# Altium PCB NanoV3.2.PcbDoc
Units mil, origin at the board's own origin, x right, y up, seen from the top; angles counter-clockwise.
Board outline 1700 x 700 mil, 2 copper layers (Top, Bottom); 33 components, 43 nets, 172 pads, 39 vias.
Unrouted connection lines stored in the file: 22.
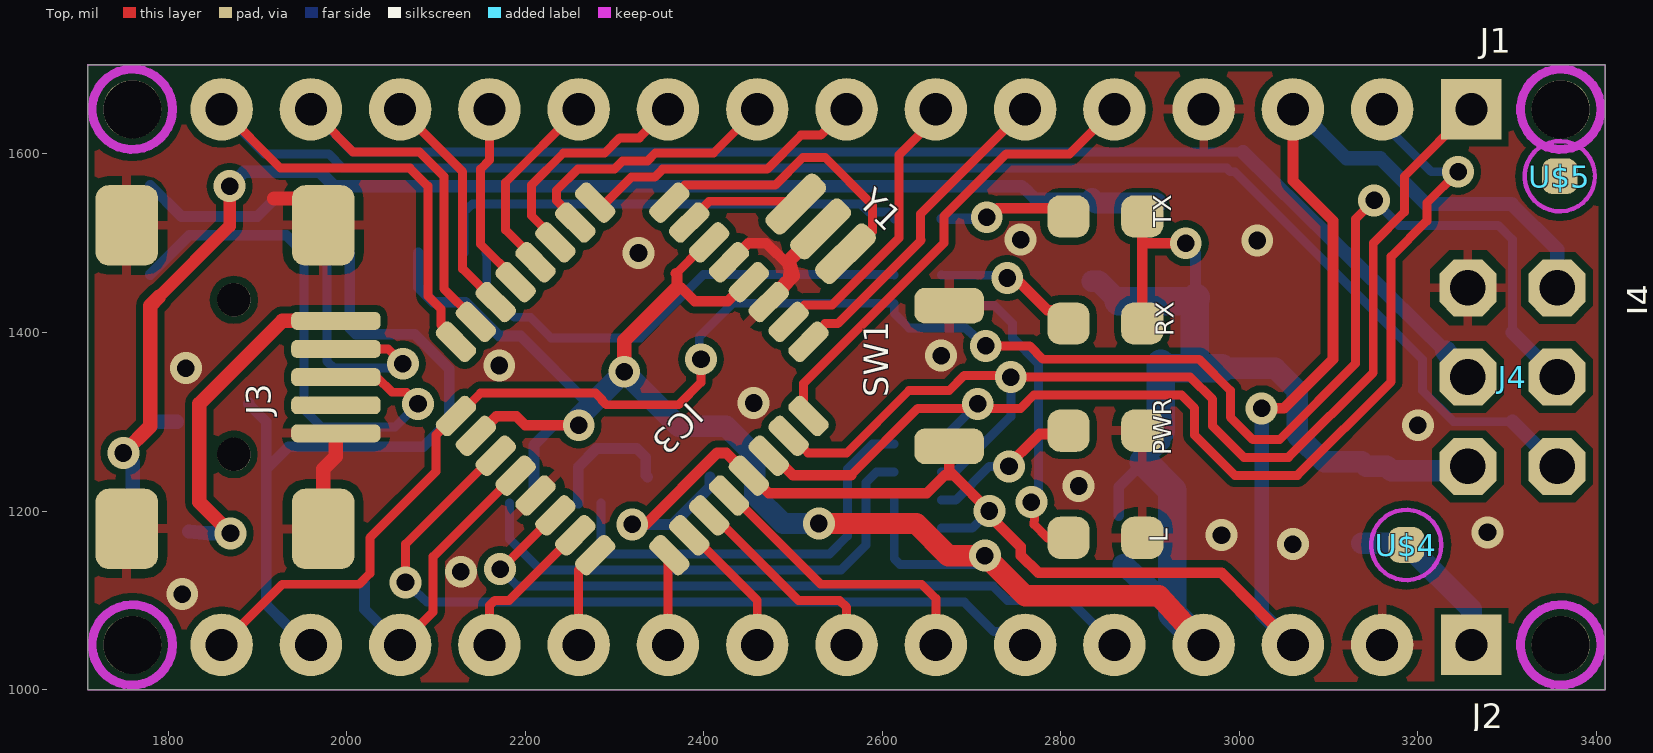
[diagram p0: Top view]
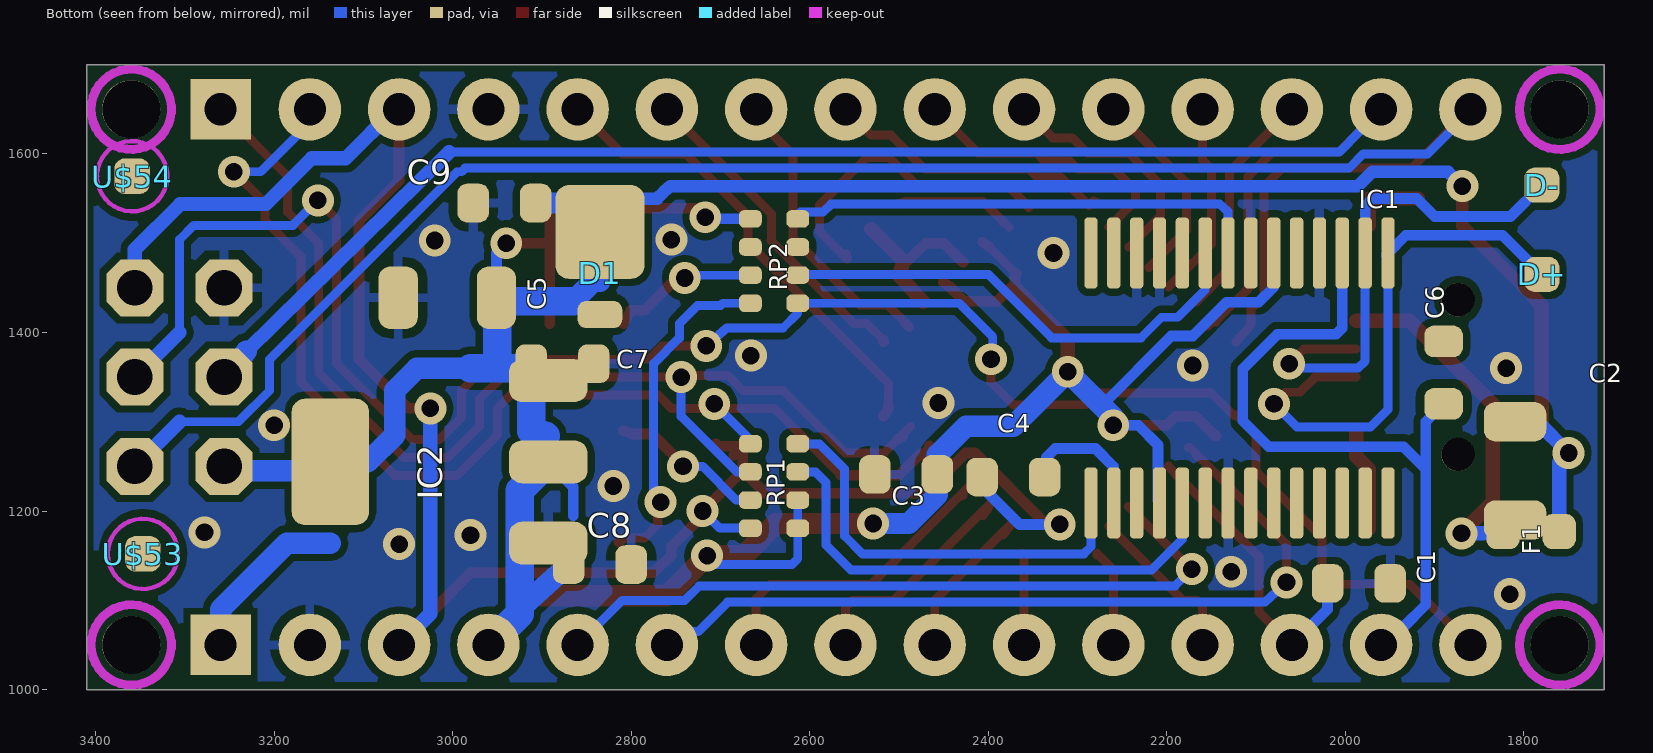
[diagram p1: Bottom view, seen from below]

## Layer stack, top to bottom
Top Solder: solder mask 0.4, Solder Resist, Dk 3.5
Top: signal copper 1.378
Dielectric 1: dielectric 12.6, FR-4, Dk 4.8
Bottom: signal copper 1.378
Bottom Solder: solder mask 0.4, Solder Resist, Dk 3.5

## Board outline
1710,1700 1710,1000 3410,1000 3410,1700

## Design rules (kind name [scope] priority, off if disabled: settings)
Clearance "Clearance (Same Net)" [All] p1: gap=8 ignorepadtopadclearanceinfootprint=FALSE
Clearance [All] p2: gap=8 ignorepadtopadclearanceinfootprint=FALSE
HoleSize [All] p1: absolutevalues=TRUE maxlimit=100000 minlimit=16 maxpercent=80.000 minpercent=20.000
HoleToHoleClearance mdDrill [All] p1: gap=8 allowstackedmicrovias=TRUE
PasteMaskExpansion Expansion_SMDPaste_OFF [InPadClass('SMDPaste_OFF')] p1: expansion=0
PasteMaskExpansion mlMinCreamFrame [All] p2: expansion=-3
PolygonConnect ThermalVias [IsVia] p1: connectstyle=Direct reliefconductorwidth=10 reliefentries=4 polygonreliefangle="90 Angle" airgapwidth=10
PolygonConnect [All] p2: connectstyle=Relief reliefconductorwidth=10 reliefentries=4 polygonreliefangle="90 Angle" airgapwidth=10
RoutingVias [All] p1: holewidth=16 width=32 viastyle="Through Hole" minholewidth=16 minwidth=32 maxholewidth=100 maxwidth=100
SolderMaskExpansion mlMinStopFrame [All] p1: expansion=0
Width [All] p1: maxlimit=10000 minlimit=10 preferedwidth=10
27 further rules are at their usual default settings.

## Classes and differential pairs
polygon class Isolate_8: Polygon_1_Net_COM Polygon_2_Net_COM
pad class SMDPaste_OFF: D+-X D--X U$4-P$1 U$5-P$1 U$53-P$1 U$54-P$1

## Components (designator, comment, footprint, x,y, rotation, side; value= is the part's Value field where it differs from the comment)
C1 "100nF" C0603-ROUND 1985,1119 r180 bottom
C2 "4,7uF_16V" TAN-A 1810,1300 r270 bottom
C3 "1uF" C0603-ROUND 2492,1241 r0 bottom
C4 "100nF" C0603-ROUND 2372,1238 r180 bottom
C5 "4,7uF_16V" TAN-A 2951,1439 r0 bottom
C6 "100nF" C0603-ROUND 1890,1355 r90 bottom
C7 "1uF" C0603-ROUND 2877,1365 r180 bottom
C8 "1uF" C0603-ROUND 2835,1140 r180 bottom
C9 "100nF" C0603-ROUND 2942,1545 r0 bottom
D1 "SS1P3L" DO220AAL 2835,1485 r270 bottom
D+ "" TP-1.00MM 1780,1465 r0 top
D- "" TP-1.00MM 1780,1565 r0 top
F1 "MFFSMF050" 0603-1608X90N 1792,1177 r0 bottom
FRAME1 "" FRAME 1000,1045 r0 top
IC1 "FT232RL" SSOP28 2285,1209 r180 bottom
IC2 "LM1117IMPX-5.0" LINEAR_SOT223 3015,1255 r90 bottom
IC3 "ATMEGA328P-AU" TQFP32-08 2320,1348 r225 top
J1 "XXXX_STRIPNANO" HEAD15-NOSS 3260,1650 r180 top
J2 "XXXX_STRIPNANO" HEAD15-NOSS 3260,1050 r180 top
J3 "" USB-MINI-B_2 1988,1287 r90 top
J4 "" 2X03 3306,1350 r90 top
L "Yellow" CHIPLED_0805 2850,1170 r270 top
PWR "Green" CHIPLED_0805 2850,1290 r270 top
RP1 "1K" CAY16 2640,1228 r90 bottom
RP2 "1K" CAY16 2640,1480 r270 bottom
RX "Red" CHIPLED_0805 2850,1410 r90 top
SW1 "RESET" SMD_157SW 2675,1430 r270 top
TX "Green" CHIPLED_0805 2850,1530 r90 top
U$4 "" FD-1-1.5 3187,1162 r270 top
U$5 "" FD-1-1.5 3359,1575 r0 top
U$53 "" FD-1-1.5 3347,1152 r270 bottom
U$54 "" FD-1-1.5 3359,1575 r270 bottom
Y1 "16MHz" RESONATOR 2531,1516 r315 top

## Footprints (in the part's own frame and the unit in brackets; to place one, negate y for a bottom-side part, rotate by r counter-clockwise, add the part's x,y. Pads: shape width x height; smd on the part's side, far side on the other; paste and mask are expansions set on the pad)
2X03 [mil] "2X03"
  oct 64x64 / inner oct 60x60 / far side oct 64x64 hole 40: 1(-100,-50) 2(-100,50) 3(0,-50) 4(0,50) 5(100,-50) 6(100,50)
  body extent -130,-80 130,80, height 150
0603-1608X90N [mil] "0603-1608X90N"
  rrect60% 37.4x39.37 smd: 1(-31.5,0) 2(31.5,0)
  body extent -50,-20 50,20, height 50
C0603-ROUND [mil] "C0603-ROUND"
  rrect60% 35.37x43.31 smd: 1(-35,0) 2(35,0)
  body extent -53,-22 53,22, height 50
CAY16 [mm] "CAY16"
  rrect60% 0.5x0.65 smd: 1(-1.2,-0.675) 2(-0.4,-0.675) 3(0.4,-0.675) 4(1.2,-0.675) 5(1.2,0.675) 6(0.4,0.675) 7(-0.4,0.675) 8(-1.2,0.675)
  body extent -1.46,-1.01 1.46,1.01, height 1.27
CHIPLED_0805 [mil] "CHIPLED_0805"
  rrect60% 47.24x47.24 smd: A(0,-41.34) C(0,41.34)
  body extent -25,-65 25,65, height 150
DO220AAL [mil] "DO220AAL"
  rrect30% 105x100 smd: P$1(-27.56,0)
  rrect60% 30x50 smd: P$2(64.96,0)
  body extent -80,-50 80,50, height 50
FD-1-1.5 [mil] "FD-1-1.5"
  rrect60% 40x40 smd paste+0: P$1(0,0)
  Top keep-out circle w5: c0,0 r39.37
  body extent -44,-44 44,44, height 150
FRAME [mil] "FRAME"
HEAD15-NOSS [mil] "HEAD15-NOSS"
  rect 67.78x67.78 / inner rect 60x60 / far side rect 67.78x67.78 hole 36: 1(0,0)
  round 70 / inner round 60 / far side round 70 hole 36: 2(100,0) 3(200,0) 4(300,0) 5(400,0) 6(500,0) 7(600,0) 8(700,0) 9(800,0) 10(900,0) 11(1000,0) 12(1100,0) 13(1200,0) 14(1300,0) 15(1400,0)
  body extent -53,-53 1453,53, height 150
LINEAR_SOT223 [mil] "LINEAR_SOT223"
  rrect60% 48x88 smd: 1(-91,-122) 2(0,-122) 3(91,-122)
  rrect34% 141.73x86.61 smd: 4(0,122.01)
  body extent -115,-166 115,166, height 50
RESONATOR [mm] "RESONATOR"
  rrect60% 0.7x2 smd: 1(-1,0) 2(0,0) 3(1,0)
  body extent -1.47,-1 1.47,1, height 3.81
SMD_157SW [mil] "SMD_157SW"
  rrect60% 40x78 smd: 1(0,0) 2(157.5,0)
  body extent -20,-53 178,53, height 150
SSOP28 [mil] "SSOP28"
  rrect60% 15x80 smd: 1(0,0) 2(25.6,0) 3(51.18,0) 4(76.77,0) 5(102.37,0) 6(127.95,0) 7(153.53,0) 8(179.13,0) 9(204.72,0) 10(230.32,0) 11(255.92,0) 12(281.5,0) 13(307.08,0) 14(332.68,0) 15(332.68,280) 16(307.08,280) 17(281.5,280) 18(255.92,280) 19(230.32,280) 20(204.72,280) 21(179.13,280) 22(153.53,280) 23(127.95,280) 24(102.37,280) 25(76.77,280) 26(51.18,280) 27(25.58,280) 28(0,280)
  body extent -8,-40 341,320, height 50
TAN-A [mil] "TAN-A"
  rrect60% 44x70 smd: 1(0,0) 2(110,0)
  body extent -22,-35 132,35, height 50
TP-1.00MM [mm] "TP-1.00MM"
  rrect60% 1x1 smd far side paste+0: X(0,0)
  body extent -0.51,-0.51 0.51,0.51, height 1.27
TQFP32-08 [mil] "TQFP32-08"
  rrect60% 50x22 smd: 1(-169,110.24) 2(-169,78.74) 3(-169,47.24) 4(-169,15.75) 5(-169,-15.75) 6(-169,-47.24) 7(-169,-78.74) 8(-169,-110.24) 17(169,-110.24) 18(169,-78.74) 19(169,-47.24) 20(169,-15.75) 21(169,15.75) 22(169,47.24) 23(169,78.74) 24(169,110.24)
  rrect60% 22x50 smd: 9(-110.24,-169) 10(-78.74,-169) 11(-47.24,-169) 12(-15.75,-169) 13(15.75,-169) 14(47.24,-169) 15(78.74,-169) 16(110.24,-169) 25(110.24,169) 26(78.74,169) 27(47.24,169) 28(15.75,169) 29(-15.75,169) 30(-47.24,169) 31(-78.74,169) 32(-110.24,169)
  body extent -194,-194 194,194, height 150
USB-MINI-B_2 [mil] "USB-MINI-B_2"
  round 37.4 hole 37.4 unplated: 1(-23.62,114.17) 1(149.61,114.17)
  rrect60% 20x100 smd: 1(0,0) 2(31.5,0) 3(62.99,0) 4(94.49,0) 5(125.98,0)
  rrect42% 90x70 smd: 6(-106.99,234.17) 7(-106.99,14.17) 8(233.01,14.17) 9(233.01,234.17)
  body extent -163,-63 288,353, height 150

## Part data
C1 C3 C4 C6 C7 C8 C9: library part C0603-ROUND, PackageName=C0603-ROUND
C2 C5: library part TAN-A, PackageName=TAN-A
D1: library part DO220AAL, PackageName=DO220AAL
D+ D-: library part TP-1.00MM, PackageName=TP-1.00MM
F1: library part 0603-1608X90N, PackageName=0603-1608X90N
FRAME1: library part FRAME, PackageName=FRAME
IC1: library part SSOP28, PackageName=SSOP28
IC2: library part LINEAR_SOT223, PackageName=LINEAR_SOT223
IC3: library part TQFP32-08, PackageName=TQFP32-08
J1 J2: library part HEAD15-NOSS, PackageName=HEAD15-NOSS
J3: library part USB-MINI-B_2, PackageName=USB-MINI-B_2
J4: library part 2X03, PackageName=2X03
L PWR RX TX: library part CHIPLED_0805, PackageName=CHIPLED_0805
RP1 RP2: library part CAY16, PackageName=CAY16
SW1: library part SMD_157SW, PackageName=SMD_157SW
U$4 U$5 U$53 U$54: library part FD-1-1.5, PackageName=FD-1-1.5
Y1: library part RESONATOR, PackageName=RESONATOR

## Free pads (board coordinates)
  round 65 hole 65 unplated: 1(1760,1050) 1(1760,1650) 1(3360,1050) 1(3360,1650)

## Via types
v1: diameter 35.69/35.69 (per signal layer), hole 19.69, Top to Bottom, 39 vias

## Nets (pads, with @x,y where several pads share a name; then routed paths per layer and width w, separated by ;. In a path a pad name is that pad's centre, name@x,y a point inside that pad or via, vN(x,y) a via of type N, cw(c..) or ccw(c..) an arc to the next point about the centre after c; other vN are vias at no path point)
3V3: C6.2 IC1.17 J2.14 | length 803.3
  Bottom w12: 1891,1321 1890,1320 1910,1300 1910,1247 ; J2.14 1940,1070 1935,1070 1910,1095 1910,1247 ; IC1.17 2003.5,1405 2010.5,1398 2076,1398 2115,1359 2115,1301 2086,1272 1935,1272 1910,1247
+5V: C3.1 C5.1 C7.1 C8.1 D1.P$1 IC1.4 IC1.20 IC2.2 IC2.4 IC3.4 IC3.6 IC3.18 J2.4 J4.2 RP1.5 RP1.6 RX.A TX.A | length 3308.7
  Top w10: v1@2306,1353 v1(2311,1356) ; 2369,1466 IC3.6@2398.32,1495.32
  Top w12: IC3.18 2146.18,1284.18 2168,1306 2190,1306 2200,1296 v1(2260,1296) ; 2369,1466 2370,1465 2370,1450 2375,1450 2390,1435 2427,1435 2443,1451 2443.27,1451 IC3.4 ; IC3.6@2398.32,1495.32 2398.5,1495.32 IC3.6 ; RX.A 2891.34,1500 ; TX.A 2891.34,1500 ; v1(2940,1500) 2891.34,1500
  Top w16: v1(2311,1356) 2311,1391 2370,1450
  Top w24: v1(2529,1186) 2638,1186 2674,1150 v1(2715,1150) 2760,1105 2910,1105 J2.4
  Bottom w10: IC1.4 IC1.4@2210,1211.77 ; v1@2307,1362 v1(2311,1356) ; 2613.43,1212.25 2613.43,1180.76 2613.43,1146.57 2620,1140 2705,1140 v1(2715,1150)
  Bottom w12: IC1.20 2080.28,1450.72 2097,1434 2133,1434 2171,1396 2195,1396 2273,1318 ; IC1.4@2210,1211.77 2210,1274 2232,1296 v1(2260,1296) v1@2260,1307 ; v1@2309,1361 2309,1358 v1(2311,1356) ; 2865,1195 2865,1227.01 IC2.2 ; v1(2940,1500) 2951,1489 C5.1
  Bottom w16: IC2.2 IC2.2@2909,1271 ; 2896,1284 IC2.2@2909,1271 ; 2915,1290 2915,1277.01 IC2.2@2909,1271 ; C5.1@2947,1435 C5.1 ; IC2.4 IC2.4@3142,1250
  Bottom w24: v1(2260,1296) 2260,1305 2273,1318 v1(2311,1356) ; v1@2311,1354 v1(2311,1356) ; v1@2529,1187 v1(2529,1186) 2489,1186 2457,1218 C3.1 2457,1263 2425,1295 2372,1295 v1(2311,1356) ; 2835,1457.44 2842.56,1457.44 2865,1435 ; C8.1 2920,1095 2925,1095 ; 2980,1360 3040,1360 3065,1335 3065,1285 3095,1255 IC2.4 ; IC2.4@3142,1250 3165,1250 3170,1245 3235,1245 3240,1250 J4.2
  Bottom w32: 2865,1435 C5.1@2947,1435 ; IC2.2 2925,1222.99 2925,1095 2925,1085 J2.4 ; 2896,1284 2912,1290 C7.1 2917,1360 2950,1360 ; C5.1 2950,1438 2950,1360 ; 2980,1360 2950,1360
A0: IC3.23 J2.12 | length 194.2
  Top w10: J2.12 2160,1094 2166,1100 2182,1100 IC3.23@2261,1179 ; IC3.23 2260.36,1179 IC3.23@2261,1179 ; IC3.23@2265.14,1183.14 IC3.23@2261,1179
A1: IC3.24 J2.11 | length 112
  Top w10: J2.11 2260,1134 2278.45,1152.45 IC3.24@2278.45,1150.55
A2: IC3.25 J2.10 | length 103.4
  Top w10: J2.10 2360,1149 2361.55,1150.55 IC3.25@2362.45,1152.55
A3: IC3.26 J2.9 | length 181.7
  Top w10: IC3.26 2376.35,1182.29 2376.35,1183.65 2460,1100 J2.9
A4: IC3.27 J2.8 | length 263.6
  Top w10: IC3.27 2399.48,1203.71 2399.48,1206.52 2506,1100 2552,1100 2560,1092 J2.8
A5: IC3.28 J2.7 | length 347
  Top w10: IC3.28@2420.9,1228.1 IC3.28@2432,1217 ; IC3.28 2430.73,1217 IC3.28@2432,1217 ; J2.7 2660,1102 2644,1118 2531,1118 IC3.28@2432,1217
A6: IC3.19 J2.6 | length 930.3
  Top w10: v1(2066,1120) 2066,1163 IC3.19@2159,1256 ; IC3.19 2159.19,1256 IC3.19@2159,1256 ; IC3.19@2176.07,1271.07 2174.07,1271.07 IC3.19@2159,1256
  Bottom w10: v1(2066,1120) 2090,1098 2692,1098 2725,1065 2745,1065 J2.6
A7: IC3.22 J2.5 | length 825.2
  Top w10: v1(2172,1135) 2172,1134 IC3.22@2233.91,1195.91 ; IC3.22 IC3.22@2233.91,1195.91 ; IC3.22@2242.85,1204.85 IC3.22@2233.91,1195.91
  Bottom w10: v1(2172,1135) 2191,1116 2724,1116 2740,1100 2810,1100 J2.5
AREF: C1.1 IC3.20 J2.13 | length 344.9
  Top w10: J2.13 2097,1087 2097,1149 IC3.20@2189.36,1241.36 ; IC3.20 IC3.20@2189.36,1241.36 ; IC3.20@2198.33,1250.33 IC3.20@2189.36,1241.36
  Bottom w12: C1.1 2020,1090 J2.13
COM: C1.2 C2.2 C3.2 C5.2 C6.1 C7.2 C8.2 C9.2 IC1.7 IC1.18 IC1.21 IC1.25 IC1.26 IC2.1 IC3.3 IC3.5 IC3.21 J1.4 J2.2 J3.1@1988,1287 J3.6 J3.7 J3.8 J3.9 J4.6 L.C PWR.C RP2.3 RP2.6 SW1.1 Y1.2 | length 411.3
  Top w12: IC3.5 2430.64,1480.64 2450,1500 2470,1500 2496.41,1474.59 2493.41,1456.59
  Top w16: 1919,1550 1973.83,1550 J3.8 ; J3.7 1973.99,1180.01 1974,1247 1988,1261 J3.1@1988,1287 ; IC3.3 2493.41,1456.59 2500,1463.19 2495,1480 Y1.2
  other v1: 1816,1107 2128,1132 3060,1163 2980,1173 3278,1176 2820,1228 3200,1296 2456,1321 1820,1360 2171,1363 2666,1374 2327,1489 3020,1503 2755,1504
D0/RX: IC3.30 J1.2 RP1.1 | length 1313.2
  Top w10: 2565,1240 2640,1315 2697,1315 v1(2707,1320) ; v1@2710,1320 v1(2707,1320) ; v1(3245,1580) 3210,1545 3210,1525 3170,1485 3170,1345 3065,1240 2995,1240 2950,1285 2950,1315 2935,1330 2770,1330 2755,1315 2712,1315 v1(2707,1320)
  Top w12: IC3.30@2466.02,1272.98 2466.02,1270.8 IC3.30 2476.09,1263.91 2500,1240 2565,1240
  Bottom w10: 2666.57,1275.24 2666.57,1279.57 v1(2707,1320) ; J1.2 3160,1635 3215,1580 v1(3245,1580)
D1/TX: IC3.31 J1.1 RP1.2 | length 1300.5
  Top w10: IC3.31@2487.37,1294.63 2501,1281 2517,1265 2560,1265 2630,1335 2675,1335 2692,1352 2742,1352 v1(2744,1350) 2945,1350 2970,1325 2970,1295 3005,1260 3055,1260 3150,1355 3150,1500 3185,1535 3185,1575 J1.1
  Top w12: IC3.31 2500.36,1281 IC3.31@2501,1281
  Bottom w10: 2666.57,1243.75 2681.75,1243.75 2744,1306 v1(2744,1350)
D2: IC3.32 J1.5 | length 531.7
  Top w10: IC3.32@2511.54,1317.54 2512,1318 2512,1343 2669,1500 2669,1530 2739,1600 2810,1600 J1.5
  Top w12: IC3.32@2512,1318 2512,1313.9 IC3.32@2517.45,1306.45
D3: IC3.1 J1.6 | length 369.5
  Top w10: IC3.1@2517.55,1391.55 2536,1410 2550,1410 2643.5,1503.5 2643,1504 2643,1533 J1.6
  Top w12: IC3.1@2517.45,1389.55 IC3.1@2517.55,1391.55
D4: IC3.2 J1.7 | length 342.3
  Top w10: IC3.2 2489.62,1406.26 2488.26,1406.26 2513,1431 2544,1431 2619,1506 2619,1599 2660,1640 J1.7
D5: IC3.9 J1.8 | length 328.8
  Top w10: IC3.9@2278.45,1545.45 2282.07,1547.45 2287.26,1542.26 2319,1574 2345,1574 2354,1583 2471,1583 2509,1621 2531,1621 J1.8
D6: IC3.10 J1.9 | length 319.2
  Top w10: IC3.10 IC3.10@2256.18,1526.82 ; IC3.10@2264.63,1518.37 IC3.10@2256.18,1526.82 ; J1.9 2411,1601 2346,1601 2337,1592 2309,1592 2300,1583 2259,1583 2235,1559 2235,1548 IC3.10@2256.18,1526.82
D7: IC3.11 J1.10 | length 275.2
  Top w10: IC3.11 2233.91,1503.91 IC3.11@2234,1504 ; IC3.11@2242.28,1495.72 IC3.11@2234,1504 ; J1.10 2328,1618 2306,1618 2289,1601 2243,1601 2207,1565 2207,1531 IC3.11@2234,1504
D8: IC3.12 J1.11 | length 231.1
  Top w10: IC3.12 IC3.12@2211.63,1481.37 ; IC3.12@2220,1473 IC3.12@2211.63,1481.37 ; J1.11 2178,1568 2178,1515 IC3.12@2211.63,1481.37
D9: IC3.13 J1.12 | length 226.3
  Top w10: J1.12 2160,1593 2150,1583 2150,1499 IC3.13@2189.36,1459.64 ; IC3.13 IC3.13@2189.36,1459.64 ; IC3.13@2198,1451 IC3.13@2189.36,1459.64
D10: IC3.14 J1.13 | length 276.7
  Top w10: J1.13 2130,1580 2130,1471.19 IC3.14 2167.09,1437.91 IC3.14@2176,1429
D11/MOSI: IC3.15 J1.14 J4.4 | length 1793.9
  Top w10: J1.14 1988.24,1621.76 1988.24,1621.16 2007.4,1602 2082,1602 2109,1575 2109,1449 2141.82,1416.18 IC3.15@2144.82,1416.18 ; IC3.15 IC3.15@2144.82,1416.18 ; IC3.15@2154,1407 IC3.15@2144.82,1416.18
  Bottom w10: J1.14 2007,1602 3004,1602
  Bottom w16: 3004,1602 3231,1379
  Bottom w24: 3231,1379 J4.4
D12/MISO: IC3.16 J1.15 J4.1 | length 2136.9
  Top w10: J1.15 1926,1584 2071,1584 2091,1564 2091,1441 2105.87,1426.13 2105.87,1408.23 IC3.16@2122.55,1389.55
  Bottom w10: J1.15 1860,1648.02 1908.02,1600 1980,1600 1996,1584 2986,1584 2990,1580 2995,1580 3205,1370 3205,1335 3240,1300 3306,1300
  Bottom w16: 3306,1300 J4.1
D13/SCK: IC3.17 J2.15 J4.3 RP2.1 | length 2189.2
  Top w10: J2.15 1928,1118 2014,1118 2026,1130 2026,1170 2100,1244 2100,1285 2121.45,1306.45 2122.55,1306.45 2122.55,1307.55 2125.55,1307.55 2150,1332 2279,1332 2286,1325 2286,1324 2291,1319 2372,1319 2397,1344 v1(2397,1370) ; v1(2716,1385) 2765,1385 2780,1370 2955,1370 2990,1335 2990,1305 3015,1280 3045,1280 3130,1365 3130,1527 v1(3151,1548)
  Bottom w10: v1@2402,1375 v1(2397,1370) 2395,1372 2395,1395 2432.76,1432.76 2613.43,1432.76 2613.43,1421.57 2630,1405 2693,1405 v1(2716,1385) ; v1(3151,1548) 3179,1520 3290,1520 3306,1504 3306,1400
  Bottom w16: 3306,1400 J4.3
N$1: IC3.8 Y1.3 | length 362
  Top w10: IC3.8@2354.83,1539.83 2354.83,1540.83 IC3.8@2361.45,1547.45 ; IC3.8@2361.55,1545.45 IC3.8@2361.45,1547.45 ; Y1.3 2558,1482 2589,1513 2589,1543 2536,1596 2511,1596 2480,1565 2379,1565 IC3.8@2361.45,1547.45
N$2: IC3.7 Y1.1 | length 141.3
  Top w10: IC3.7@2376.57,1517.57 IC3.7@2384.18,1525.18 ; IC3.7 IC3.7@2384.18,1525.18 ; Y1.1 2493,1547 2406,1547 IC3.7@2384.18,1525.18
N$3: PWR.A RP1.3 | length 191.2
  Top w12: v1(2742,1250) 2740,1248 2735,1245 2776.34,1286.34 2798.66,1286.34 PWR.A
  Bottom w10: 2666.57,1212.25 2682.25,1212.25 2720,1250 v1(2742,1250)
N$4: C4.2 IC1.2 | length 151.5
  Bottom w12: IC1.2 2259.4,1249.4 2280,1270 2325,1270 2335,1260 2335,1240 C4.2
N$5: D+.X IC1.15 J3.3 | length 630.4
  Top w10: J3.3 2034,1350 2051,1333 2067,1333 v1(2080,1320)
  Bottom w10: IC1.15@1952,1490 1952.5,1489.5 1952.5,1485 1952.5,1313.5 1972,1294 2054,1294 v1(2080,1320)
  Bottom w12: D+.X 1824,1509 1932.32,1509 IC1.15
  Bottom w14: IC1.15 1952.32,1485.18 IC1.15@1952.5,1485
N$6: D-.X IC1.16 J3.4 | length 572
  Top w10: J3.4 2046.51,1381.49 v1(2063,1365)
  Bottom w10: IC1.16@1977.5,1490 1978,1489.5 1978,1368 1986,1360 2058,1360 v1(2063,1365)
  Bottom w12: D-.X 1815,1530 1900,1530 1920,1550 1970,1550 1977.92,1542.08 IC1.16
  Bottom w14: IC1.16 1977.92,1489.42 IC1.16@1978,1489.5
N$7: L.A RP2.8 | length 388.5
  Top w10: v1(2767,1210) 2771,1200 2770,1185 2785,1170 L.A@2809.34,1170
  Top w12: L.A 2814,1165.34 L.A@2809.34,1170
  Bottom w10: 2666.57,1432.76 2697.24,1432.76 2700,1430 2726,1430 2746,1410 2746,1394 2775,1365 2775,1221 v1(2767,1210)
N$8: IC1.23 RP2.2 | length 549.5
  Bottom w10: IC1.23 2157,1448 2188,1417 2206,1417 2229,1394 2329,1394 2400,1465 2612.68,1465 2613.43,1464.25
  Bottom w12: IC1.23 IC1.23
N$9: IC1.22 RP2.4 | length 541
  Bottom w10: IC1.22 2131.47,1535.47 2141,1544 2576.18,1544 2576.18,1543.82 2585,1535 2610.67,1535 2613.43,1527.24
N$11: RP2.5 TX.C | length 154.5
  Top w12: v1(2717,1529) 2725,1535 2729,1539 2807.66,1539 TX.C
  Bottom w12: 2666.57,1527.24 2715.24,1527.24 v1(2717,1529)
N$26: F1.2 J3.5 | length 397.6
  Top w16: v1(1870,1175) 1835,1210 1835,1320 1927.98,1412.98 J3.5
  Bottom w16: F1.2 1845.5,1175 v1(1870,1175)
N$29: RP2.7 RX.C | length 166.1
  Top w12: v1(2740,1461) 2750,1460 2785,1425 2800.2,1425 RX.C
  Bottom w10: 2666.57,1464.25 2735.25,1463.75 v1(2740,1461)
RESET: C4.1 IC3.29 J1.3 J2.3 J4.5 RP1.4 SW1.2 | length 2231.6
  Top w10: IC3.29 2450.77,1241.5 IC3.29@2451.5,1241.5
  Top w12: v1(2320,1185) 2335,1185 2415,1265 2425.27,1265 IC3.29 ; IC3.29@2451.5,1241.5 2473,1220 2650,1220 2670,1240 2680,1240 ; SW1.2@2685,1262.5 SW1.2 ; SW1.2@2705,1275 2702.5,1272.5 SW1.2 ; v1(3025,1315) 3050,1315 3105,1370 3105,1525 3060,1570 J1.3 ; J2.3 2980,1131 2775,1131 2755,1150 2755,1160 2720,1195 v1(2720,1200) 2680,1240 ; SW1.2 2675,1245 2680,1240
  Bottom w10: 2666.57,1180.76 2700.76,1180.76 v1(2720,1200) ; J1.3 J1.3@3065,1650
  Bottom w12: v1(2320,1185) 2365,1185 2407,1227 C4.1
  Bottom w16: v1(3025,1315) 3025,1085 J2.3 ; J1.3@3065,1650 3120,1595 3158,1595 3209,1544 3305,1544 3356,1493 J4.5
RX: IC1.1 RP1.8 | length 475.7
  Bottom w10: IC1.1 2285,1160 2293,1152 2541,1152 2561,1172 2561,1247 2589.24,1275.24 2613.43,1275.24
TX: IC1.5 RP1.7 | length 572.1
  Bottom w10: IC1.5 2182.63,1168.37 2217,1134 2554,1134 2582,1162 2582,1232 2593.75,1243.75 2613.43,1243.75
VIN: IC2.3 J2.1 | length 193.7
  Bottom w24: 3137,1164 3186,1164 3260,1090 J2.1
VUSB: C2.1 C9.1 D1.P$2 F1.1 | length 1585.1
  Top w14: 1790,1440 1869,1519 v1(1869,1564)
  Top w16: v1(1750,1265) 1780,1295 1780,1430 1790,1440
  Bottom w14: v1(1869,1564) 1885,1580 1970,1580 1986,1564 2756,1564 2763,1558 2771,1550 2834.96,1550
  Bottom w16: F1.1 1760.5,1254.5 v1(1750,1265) 1785,1300 C2.1 ; 2835,1549.96 2844.96,1545
  Bottom w24: 2834.96,1550 2835,1549.96 2839.96,1545 C9.1
pads on no net: IC1.3 IC1.6 IC1.8 IC1.9 IC1.10 IC1.11 IC1.12 IC1.13 IC1.14 IC1.19 IC1.24 IC1.27 IC1.28 J3.1@1873.83,1263.38 J3.1@1873.83,1436.61 J3.2 U$4.P$1 U$5.P$1 U$53.P$1 U$54.P$1

## Polygon pours and split planes (outlines as drawn)
COM on Top "Polygon_1_Net_COM" (solid, remove dead copper, pour order 1): 1715,1694.99 3535,1700.01 3535,1010.01 1715,1004.99
COM on Bottom "Polygon_2_Net_COM" (solid, remove dead copper, pour order 0): 1715,1694.99 3480,1700.01 3480,1010.01 1715,1004.99

## Keep-outs
Top:
  circle w10: c3360,1650 r45
  circle w10: c1760,1050 r45
  circle w10: c3360,1050 r45
  circle w10: c1760,1650 r45
Bottom:
  circle w10: c3360,1050 r45
  circle w10: c3360,1650 r45
  circle w10: c1760,1650 r45
  circle w10: c1760,1050 r45
Keep-Out Layer:
  the board outline again, w0

## Silkscreen, mask and mechanical layers (free items; w line width, h text height)
Dimension:
  the board outline again, w0
Top Assembly:
  lines w16: 3150,1545 3167,1545 ; 3251,1540 3265,1540 ; 3142,1553 3160,1531 3178,1553 3142,1553 ; 3241,1531 3277,1531 3259,1553 3241,1531
  text "*" at 1923,1602 h31
  text "*" at 2022,1602 h31
  text "*" at 2123,1602 h31
  text "*" at 2423,1602 h31
  text "*" at 2524,1602 h31
  text "*" at 2723,1602 h31
  text "D12" at 1819,1572 h49.6
  text "D11" at 1919,1572 h49.6
  text "D10" at 2018,1572 h49.6
  text "D9" at 2134,1572 h49.6
  text "D8" at 2235,1572 h49.6
  text "D7" at 2333,1572 h49.6
  text "D6" at 2434,1572 h49.6
  text "D5" at 2536,1572 h49.6
  text "D4" at 2634,1572 h49.6
  text "D3" at 2735,1572 h49.6
  text "D2" at 2833,1572 h49.6
  text "GND" at 2921,1572 h49.6
  text "RST" at 3021,1572 h49.6
  text "RX0" at 3120,1572 h49.6
  text "TX1" at 3220,1572 h49.6
  text "ICSP" at 3303,1510 h49.6
  text "TX" at 2964.93,1505.39 h49.6 r90
  text "RX" at 2969.93,1394.17 h49.6 r90
  text "NANO" at 3094.02,1303.88 h62 r90
  text "RST" at 2758.8,1297.42 h49.6 r90
  text "PWR" at 2969.93,1261.61 h49.6 r90
  text "ARDUINO" at 3158.02,1257.12 h62 r90
  text "L" at 2959.93,1169.05 h49.6 r90
  text "1" at 3379.7,1159.7 h85.25 r90
  text "ARDUINO.CC" at 2428,1151 h49.6
  text "D13" at 1819,1096 h49.6
  text "3V3" at 1920,1096 h49.6
  text "REF" at 2019,1096 h49.6
  text "A0" at 2133,1096 h49.6
  text "A1" at 2234,1096 h49.6
  text "A2" at 2333,1096 h49.6
  text "A3" at 2433,1096 h49.6
  text "A4" at 2532,1096 h49.6
  text "A5" at 2633,1096 h49.6
  text "A6" at 2733,1096 h49.6
  text "A7" at 2832,1096 h49.6
  text "5V" at 2932,1096 h49.6
  text "RST" at 3032,1096 h49.6
  text "GND" at 3135,1096 h49.6
  text "VIN" at 3234,1096 h49.6
Bottom Assembly:
  circle w16: c2470,1361 r5.65